# EAGLE board WattMeter_v2 (EAGLE 6.5.0)
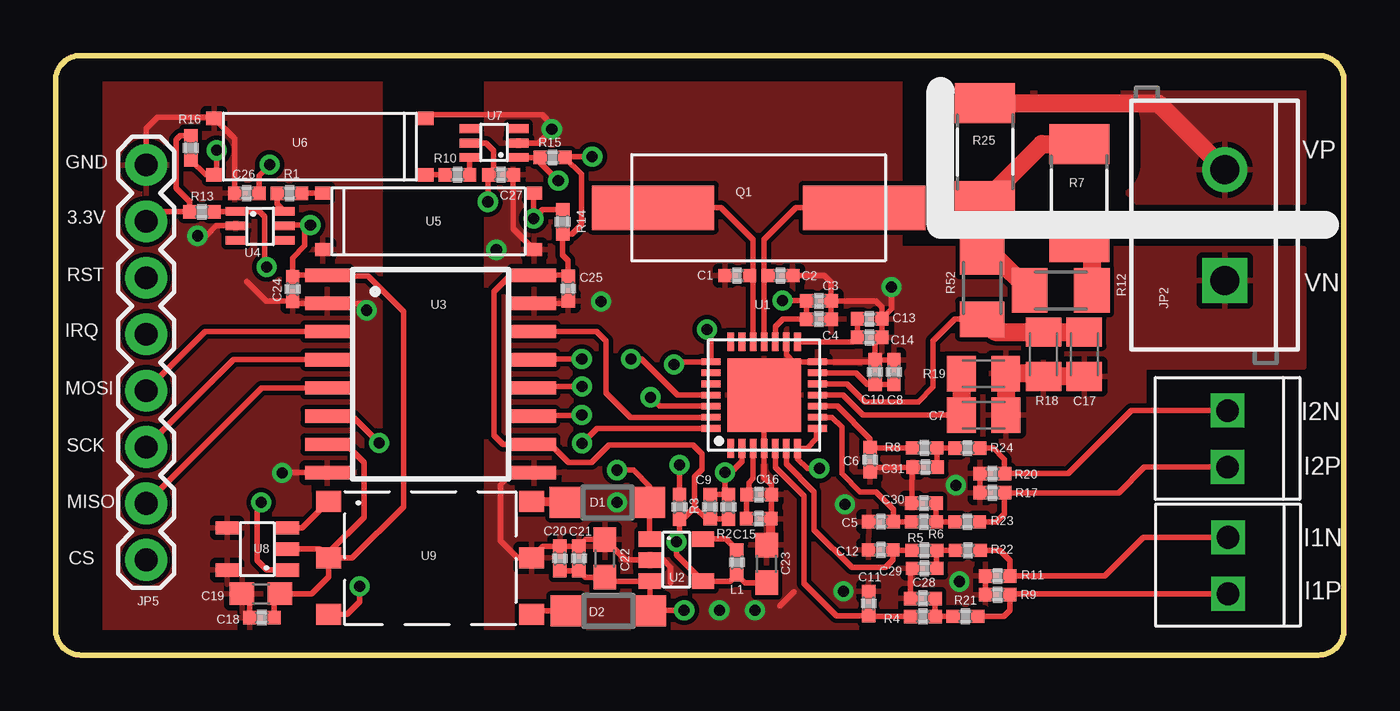
[diagram p0: board, top side]
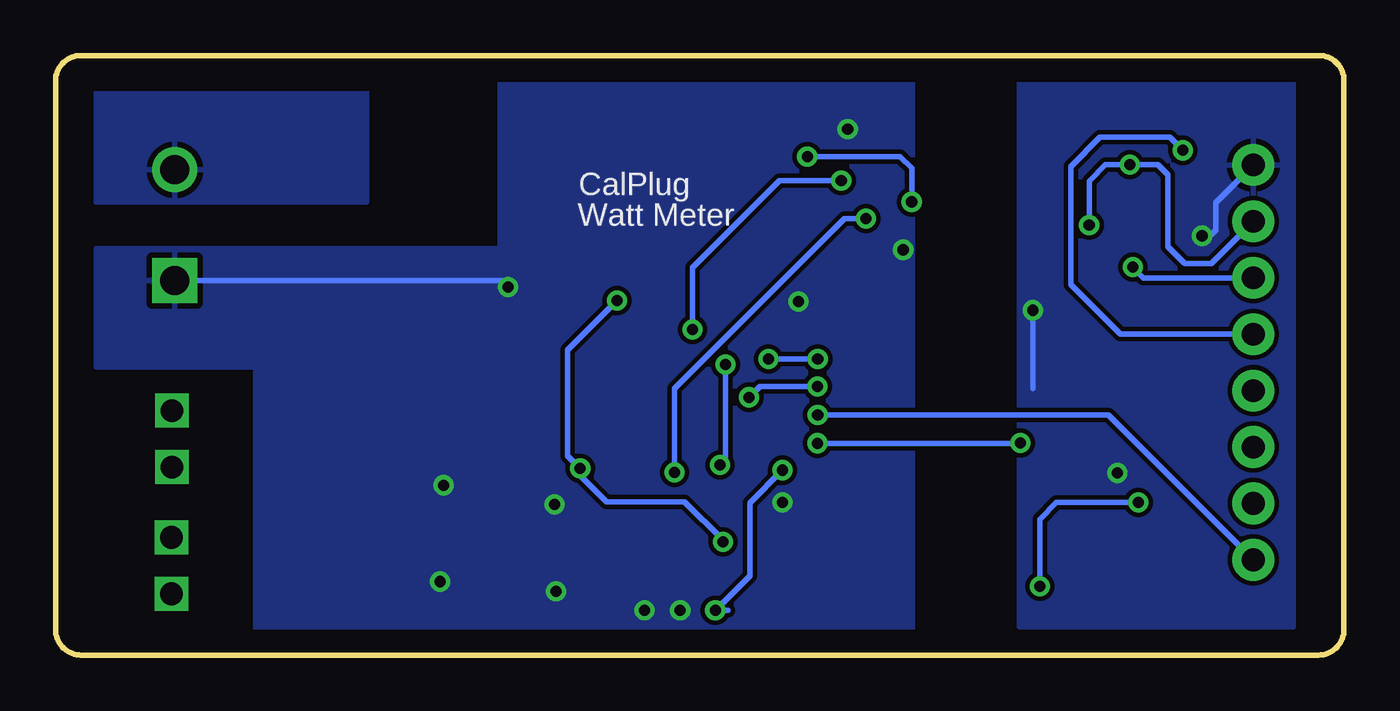
[diagram p1: board, bottom side, seen from below]

Size 58 x 27 mm. Coordinates in mm from the lower left corner, seen from the top.
Outline: 1.15,0 56.84,0 arc90 58,1.16 58,25.86 arc90 56.86,27 1.12,27 arc90 0,25.88 0,1.15 arc90 1.15,0
Copper layers (1*16): Top 0.035mm / dielectric 1.5mm / Bottom 0.035mm
Design rules "default": minimum track width 10mil, minimum drill 24mil, track to track 8mil, track to pad 8mil, pad to pad 8mil, via to via 8mil, smd to smd 8mil, copper to edge 40mil, drill to drill 8mil, minimum pad ring 10mil, minimum via ring 8mil, stop-mask expansion 4mil, vias tented up to drill 0mil, thermal gap 10mil
Net classes: 1 HIGHVOLTAGE: width 0.254 mm, drill 0.508 mm, clearance 2.413 mm to class 0, clearance 0.152 mm; 2 ic: width 0.152 mm, drill 0.305 mm, clearance 0.152 mm to class 0, clearance 2.413 mm to class 1, clearance 0.152 mm

## Footprints (pad centres in the part's own frame; a part is rotated, then mirrored left to right if it is on the bottom)
0402-CAP = smd 0.6 x 0.6: 1 -0.55,0; 2 0.55,0
C0805K = smd 1.3 x 1.6: 1 -1,0; 2 1,0
C0603 = smd 1.1 x 1: 1 -0.85,0; 2 0.85,0
SOD123 = smd 1.4 x 1.4: A 1.9,0; C -1.9,0
SCREWTERMINAL-5MM-2 = drill 1.3 pad 2.032 square: 1 0,0 | drill 1.3 pad 2.032: 2 5,0
1X02_2.54_SCREWTERM = drill 1.016 square: P1 2.54,0; P2 0,0
1X08_ROUND = drill 1.016 pad 1.88: 1 0,0; 2 2.54,0; 3 5.08,0; 4 7.62,0; 5 10.16,0; 6 12.7,0; 7 15.24,0; 8 17.78,0
0402-RES = smd 0.6 x 0.6: 1 -0.55,0; 2 0.55,0
HC-49S = smd 5.5 x 2: 1 -4.75,0; 2 4.75,0
R2010 = smd 1.8 x 2.7: 1 -2.2,0; 2 2.2,0
M1206 = smd 1.6 x 2: 1 -1.4,0; 2 1.4,0
C0805K@1 = smd 1.3 x 1.6: 1 -1,0; 2 1,0
28-WFQFN = smd 0.85 x 0.3: 1 -2.4,1.5; 2 -2.4,1; 3 -2.4,0.5; 4 -2.4,0; 5 -2.4,-0.5; 6 -2.4,-1; 7 -2.4,-1.5; 15 2.4,-1.5; 16 2.4,-1; 17 2.4,-0.5; 18 2.4,0; 19 2.4,0.5; 20 2.4,1; 21 2.4,1.5 | smd 0.3 x 0.85: 8 -1.5,-2.4; 9 -1,-2.4; 10 -0.5,-2.4; 11 0,-2.4; 12 0.5,-2.4; 13 1,-2.4; 14 1.5,-2.4; 22 1.5,2.4; 23 1,2.4; 24 0.5,2.4; 25 0,2.4; 26 -0.5,2.4; 27 -1,2.4; 28 -1.5,2.4 | smd 3.3 x 3.3: PAD 0,0
TSOT25 = smd 0.7 x 1: 1 0,0; 2 0.95,0; 3 1.9,0; 4 1.9,2.4; 5 0,2.4
16-SOIC = smd 2 x 0.6: 1 0,8.89; 2 0,7.62; 3 0,6.35; 4 0,5.08; 5 0,3.81; 6 0,2.54; 7 0,1.27; 8 0,0; 9 9.3,0; 10 9.3,1.27; 11 9.3,2.54; 12 9.3,3.81; 13 9.3,5.08; 14 9.3,6.35; 15 9.3,7.62; 16 9.3,8.89
DCKT = smd 0.9 x 0.4: 1 0,1.3; 2 0,0.65; 3 0,0; 4 2.2,0; 5 2.2,0.65; 6 2.2,1.3
4-SMD = smd 0.7 x 0.6: 1 0,2.54; 2 0,0; 3 9.52,0; 4 9.52,2.54
SOT-23-5 = smd 0.6 x 1.05: 1 0,0; 2 0.95,0; 3 1.9,0; 4 1.9,2.7; 5 0,2.7
TRANSFO_3.3 = smd 1.12 x 0.96: 1 0,5.08; 2 0,2.54; 3 0,0; 4 9.14,0; 5 9.14,2.54; 6 9.14,5.08

## Placement (x,y rotation side)
C1  20p  [0402-CAP]  30.69,17.09 0 top
C2  20p  [0402-CAP]  32.63,17.09 180 top
C3  4.7u  [0402-CAP]  34.36,15.95 180 top
C4  0.1u  [0402-CAP]  34.36,15.13 180 top
C5  33n  [0402-CAP]  37.16,6.01 0 top
C6  33n  [0402-CAP]  36.67,8.8 270 top
C7  68nF  [C0805K]  41.78,10.81 0 top
C8  0.1u  [0402-CAP]  37.74,12.74 90 top
C9  1u  [0402-CAP]  29.47,6.68 270 top
C10  4.7u  [0402-CAP]  36.89,12.74 90 top
C11  33n  [0402-CAP]  36.6,2.32 270 top
C12  33n  [0402-CAP]  37.15,4.74 180 top
C13  4.7u  [0402-CAP]  36.65,15.14 180 top
C14  0.1u  [0402-CAP]  36.65,14.31 180 top
C15  4.7u  [0402-CAP]  31.66,6.14 180 top
C16  0.1u  [0402-CAP]  31.68,7.23 180 top
C17  68nF  [C0805K]  46.31,13.55 270 top
C18  0.1u  [0402-CAP]  9.29,1.69 0 top
C19  10uF TANT  [C0603]  9.25,2.77 180 top
C20  0.1u  [0402-CAP]  22.7,4.35 270 top
C21  1u  [0402-CAP]  23.56,4.35 270 top
C22  10uF  [C0603]  24.73,4.36 90 top
C23  10uF  [C0603]  32.01,4.11 90 top
C24  0.1u  [0402-CAP]  10.67,16.49 270 top
C25  0.1u  [0402-CAP]  23.08,16.5 90 top
C26  0.1u  [0402-CAP]  8.61,20.8 180 top
C27  0.1u  [0402-CAP]  20.05,21.63 0 top
C28  33n  [0402-CAP]  39.04,2.55 0 top
C29  33n  [0402-CAP]  39.12,3.91 180 top
C30  33n  [0402-CAP]  39.09,6.84 0 top
C31  33n  [0402-CAP]  39.15,8.46 180 top
D1  MBR0520LT  [SOD123]  24.84,6.88 180 top
D2  MBR0520LT  [SOD123]  24.89,1.99 180 top
JP2  [SCREWTERMINAL-5MM-2]  52.63,16.86 90 top
JP3  [1X02_2.54_SCREWTERM]  52.78,5.3 270 top
JP4  [1X02_2.54_SCREWTERM]  52.76,11.01 270 top
JP5  [1X08_ROUND]  4.08,4.29 90 top
L1  15nH  [0402-RES]  30.67,4.18 270 top
Q1  QUARTZ_3.58M_2PIN  [HC-49S]  31.65,20.14 0 top
R1  560  [0402-RES]  10.53,20.8 180 top
R2  10k  [0402-RES]  30.29,6.68 90 top
R3  10k  [0402-RES]  28.09,6.68 90 top
R4  1k  [0402-RES]  39.04,1.74 180 top
R5  1k  [0402-RES]  39.11,4.72 180 top
R6  1k  [0402-RES]  39.09,6 180 top
R7  220k  [R2010]  46.08,20.81 90 top
R8  1k  [0402-RES]  39.12,9.33 180 top
R9  51  [0402-RES]  42.41,2.72 0 top
R10  560  [0402-RES]  18.09,21.63 0 top
R11  51  [0402-RES]  42.41,3.56 180 top
R12  120k  [M1206]  45.25,16.42 0 top
R13  10k  [0402-RES]  6.59,19.96 180 top
R14  10k  [0402-RES]  22.83,19.51 270 top
R15  10k  [0402-RES]  22.37,22.41 0 top
R16  10k  [0402-RES]  6.09,22.84 90 top
R17  51  [0402-RES]  42.17,7.31 0 top
R18  499R  [C0805K@1]  44.47,13.55 270 top
R19  499R  [C0805K@1]  41.77,12.67 0 top
R20  51  [0402-RES]  42.17,8.17 180 top
R21  100  [0402-RES]  40.96,1.75 180 top
R22  100  [0402-RES]  41.07,4.72 180 top
R23  100  [0402-RES]  41.04,6 180 top
R24  100  [0402-RES]  41.05,9.32 180 top
R25  220k  [R2010]  41.84,22.65 90 top
R52  120k  [M1206]  41.71,16.53 90 top
U1  ADE7953  [28-WFQFN]  31.9,11.71 90 top
U2  PAM2305  [TSOT25]  26.75,5.23 270 top
U3  ISO7241  [16-SOIC]  12.23,8.22 0 top
U4  SN74LVC  [DCKT]  8.11,18.68 0 top
U5  PS2505  [4-SMD]  12.03,18.26 0 top
U6  PS2505  [4-SMD]  16.66,24.17 180 top
U7  SN74LVC  [DCKT]  20.84,23.71 180 top
U8  SN6501  [SOT-23-5]  10.43,3.83 90 top
U9  TRANSFO_3.3  [TRANSFO_3.3]  12.29,1.84 0 top

## Library data of the parts
C1-C6 C8-C16 C18 C20 C21 C24-C31 L1 R1-R6 R8-R11 R13-R17 R20-R24 = Nizanlib
C7 C17 C19 C22 C23 R7 R12 R18 R19 R25 R52 = resistor
D1 D2 = diode
JP2 = SparkFun-Connectors; STOREFRONT_ID: PRT-08432
JP3-JP5 = SparkFun-Connectors
Q1 = CalPlug; DIGIKEY: http://www.digikey.com/product-detail/en/txc-corporation/9C-3.579545MBBK-T/887-2450-1-ND/4475440
U1 U8 = CalPlug
U2 = Damien_regulator
U3-U7 = Damien_divers
U9 = Damien_power

## Nets
CS: JP5.1 U3.11
CS_ISO: U1.28 U3.6
GND: C18.1 C19.2 C24.2 C26.2 JP5.8 U3.2 U3.8 U4.2 U5.2 U6.3 U8.4 U8.5
GNDI: C1.1 C2.1 C3.1 C4.1 C5.1 C6.2 C7.2 C8.2 C10.2 C11.1 C12.2 C13.1 C14.1 C15.1 C16.1 C17.2 C20.1 C21.1 C22.2 C23.2 C25.1 C27.2 C28.1 C29.2 C30.1 C31.2 JP2.1 R9.1 R11.2 R17.1 R18.2 R19.2 R20.2 U1.4 U1.14 U1.16 U1.PAD U2.2 U3.9 U3.15 U5.3 U6.2 U7.2 U9.5
I1N: JP3.P2 R11.1 R22.1
I1P: JP3.P1 R9.2 R21.1
I2N: JP4.P2 R20.1 R24.1
I2P: JP4.P1 R17.2 R23.1
IRQ: JP5.5 R16.1 U6.4
IRQ_ISO: R3.2 R15.1 U1.22 U7.1
MISO: JP5.2 U3.5
MISO_ISO: U1.26 U3.12
MOSI: JP5.4 U3.3
MOSI_ISO: U1.27 U3.14
N$1: C1.2 Q1.1 U1.19
N$2: C2.2 Q1.2 U1.18
N$3 [ic]: C7.1 R19.1 U1.11
N$4: L1.1 U2.5
N$7: C8.1 C10.1 U1.13
N$8: C13.2 C14.2 U1.15
N$10: C12.1 R5.2 U1.6
N$11: C11.2 R4.2 U1.5
N$12: C15.2 C16.2 U1.3
N$14: R12.1 R52.2
N$15: R7.1 R12.2
N$17: R7.2 R25.1
N$18: D1.A U9.6
N$19: C20.2 C21.2 C22.1 D1.C D2.C U2.1 U2.3
N$20: D2.A U9.4
N$21: U8.3 U9.1
N$23: U8.1 U9.3
N$24: C28.2 R4.1 R21.2
N$25: R1.1 U5.1
N$26: R1.2 U4.6
N$27: C29.1 R5.1 R22.2
N$28: C6.1 R8.2 U1.10
N$29: R10.1 U6.1
N$30: R10.2 U7.6
N$32: C5.2 R6.2 U1.9
N$33: C30.2 R6.1 R23.2
N$34: C31.1 R8.1 R24.2
RESET: JP5.6 R13.1 U4.1
RESET_ISO: C9.1 R2.2 R14.1 U1.2 U5.4
SCK: JP5.3 U3.4
SCK_ISO: U1.25 U3.13
V2P [ic]: C17.1 R18.1 R52.1 U1.12
VCC: C3.2 C4.2 C9.2 C23.1 C25.2 C27.1 L1.2 R2.1 R3.1 R14.2 R15.2 U1.7 U1.8 U1.17 U2.4 U3.10 U3.16 U7.5
VDD: C18.2 C19.1 C24.1 C26.1 JP5.7 R13.2 R16.2 U3.1 U3.7 U4.5 U8.2 U9.2
VP_IN: JP2.2 R25.2

## Tracks (layer width: path | path; a pad name or v marks a point on that pad's centre or on a via)
CS  (via drill 0.5)
  Top 0.254: U3.11 21.57,10.8 23.67,10.8 v23.69,10.82
  Top 0.406: U3.11 21.51,10.78
  Bottom 0.254: JP5.1 10.61,10.82 v23.69,10.82
CS_ISO  (via drill 0.5)
  Top 0.254: U3.6 13.36,10.76 v14.56,9.56 | v23.7,9.54 24.37,10.21 U1.28
  Bottom 0.254: v23.7,9.54 14.58,9.54 v14.56,9.56
GND  (via drill 0.5)
  Top 0.254: JP5.8 4.08,23.7 4.6,24.22 7.09,24.22 U6.3 8.06,23.25 C26.2 | v6.39,18.88 6.79,18.88 7.24,19.33 U4.2 8.39,19.33 | 8.6,16.82 9.48,15.94 C24.2 10.77,15.84 U3.2 13.98,15.84 v14,15.53 | 8.4,2.72 C19.2 8.74,2.43 C18.1 | U8.4 | U3.8 v10.21,8.22 v10.2,8.21
  Bottom 0.254: v6.39,18.88 6.03,18.88 5.78,19.13 5.78,20.37 JP5.8 | 14,12.01 v14,15.53
  pour Top: 2.24,26 14.61,26 14.61,1 2.24,1
  pour Bottom: 2.27,1.27 14.61,1.27 14.61,26 2.27,26
GNDI  (via drill 0.5)
  Top 0.254: C15.1 32.23,6.16 C16.1 32.23,7.65 31.9,7.98 U1.4 31.9,11.22 | C2.1 34.61,17.09 34.91,16.79 C3.1 | C27.2 20.6,19.21 U5.3 | U3.15 22.97,15.84 C25.1 | U7.2 21.75,23.06 22.13,23.44 22.13,24.1 21.9,24.33 16.82,24.33 U6.2 | 32.61,2.22 33.25,2.86 | 32.36,4.96 C23.2 | 27.69,3.26 27.69,3.96 27.37,4.28 U2.2 25.66,4.28 C22.2 23.87,5.21 C21.1 C20.1 21.95,4.9 U9.5 20.79,4.38 20.03,5.14 20.03,7.67 20.58,8.22 U3.9 | U1.16 32.9,13.53 33.22,13.21 33.4,13.21 U1.14 36.81,13.21 C10.2 | C3.1 C4.1 | C10.2 36.89,14 C14.1 C13.1 | C10.2 C8.2 | C13.1 37.2,15.68 36.93,15.95 C3.1 | C13.1 37.63,15.57 v37.63,16.58 | C30.1 38.54,8.4 C31.2 36.88,8.46 C6.2 | R17.1 R20.2 | R9.1 R11.2 | C28.1 38.49,3.83 C29.2
  Top 0.305: 33.4,13.21 33.4,12.72 33.25,12.56 | 33.25,12.56 31.9,11.22 | 32.9,12.91 33.25,12.56
  Top 0.406: C23.2 32.21,5.16 C15.1
  Top 0.813: C17.2 R18.2 | 44.35,12.67 R19.2 C7.2
  Bottom 0.254: JP2.1 37.91,16.86 v37.63,16.58
  other vias: 29.88,2.01 31.48,2.01 22.34,23.69 40.53,7.65 40.69,3.31 35.53,6.79 19.84,18.25 24.55,15.92 25.27,6.88 35.47,2.87
  pour Top: 19.41,26 19.41,1 49,1 49,12.98 56.18,12.98 56.18,18.3 38,18.3 38,26
  pour Bottom: 19.42,1 19.42,26 38,26 38,18.3 56.18,18.3 56.18,12.98 49,12.98 49,1
I1N
  Top 0.254: R22.1 42.51,4.72 42.96,4.27 R11.1 47.23,3.56 48.97,5.3 JP3.P2
I1P
  Top 0.254: R21.1 42.69,1.75 42.96,2.02 R9.2 43,2.76 JP3.P1
I2N
  Top 0.254: R24.1 42.22,9.32 42.72,8.82 R20.1 45.59,8.17 48.43,11.01 JP4.P2
I2P
  Top 0.254: R23.1 42.36,6 42.72,6.36 R17.2 47.86,7.31 49.02,8.47 JP4.P1
IRQ  (via drill 0.5)
  Top 0.254: R16.1 6.75,21.63 U6.4 7.26,21.75 v7.26,22.73
  Bottom 0.254: v7.26,22.73 7.85,23.32 10.98,23.32 12.3,22 12.3,16.69 10.06,14.45 JP5.5
IRQ_ISO  (via drill 0.5)
  Top 0.254: U7.1 R15.1 21.82,22.18 v22.63,21.37 | v29.33,14.66 29.5,14.49 U1.22 27.96,13.21 v27.84,13.09 | v28.09,8.56 R3.2
  Bottom 0.254: v29.33,14.67 v29.33,14.66 29.33,17.45 25.41,21.37 v22.63,21.37 | v28.09,8.56 27.84,8.81 v27.84,13.09
MISO
  Top 0.254: JP5.2 9.28,12.03 U3.5
MISO_ISO  (via drill 0.5)
  Top 0.254: U1.26 27.19,11.21 v26.79,11.61 | U3.12 21.6,12.1 v23.7,12.1
  Bottom 0.254: v26.79,11.61 26.3,12.1 v23.7,12.1
MOSI
  Top 0.254: JP5.4 6.74,14.57 U3.3
MOSI_ISO
  Top 0.254: U1.27 25.89,10.71 24.79,11.81 24.79,14.14 24.36,14.57 U3.14
N$1
  Top 0.254: 26.86,19.43 Q1.1 29.97,20.14 31.4,18.71 31.4,17.25 C1.2 31.24,17 31.4,16.83 U1.19
N$2
  Top 0.254: 36.4,19.75 Q1.2 33.34,20.14 31.9,18.71 31.9,17.27 C2.2 31.9,16.91 U1.18
N$3
  Top 0.254: U1.11 35.44,11.71 36.34,10.81 C7.1
  Top 0.813: R19.1 C7.1
N$4
  Top 0.254: U2.5 30.17,5.23 L1.1
N$7
  Top 0.254: U1.13 36.04,12.71 36.56,12.19 C10.1 C8.1
N$8
  Top 0.254: C13.2 C14.2 35.9,14.11 U1.15
N$10
  Top 0.254: R5.2 37.72,4.72 C12.1 37.7,4.3 37.35,3.95 35.85,3.95 34.15,5.65 34.15,7.35 32.9,8.6 U1.6
N$11
  Top 0.254: R4.2 36.64,1.74 C11.2 35.15,1.77 33.69,3.23 33.69,7.16 32.4,8.45 U1.5
N$12
  Top 0.254: U1.3 31.4,7.95 31.21,7.76 31.21,7.31 C16.2 31.11,7.21 C15.2
N$14
  Top 0.813: R12.1 42.34,17.93 R52.2
N$15
  Top 0.813: R7.1 46.65,18.04 R12.2
N$17
  Top 0.813: R25.1 44.4,23.01 R7.2
N$18
  Top 0.406: U9.6 22.94,6.92 D1.A
N$19  (via drill 0.5)
  Top 0.254: C22.1 23.85,3.51 C21.2 C20.2 | 24.91,3.33 U2.3 26.75,2.03 D2.C | D2.C 26.76,1.77 arc-90 26.75,1.78 | U2.1 arc-90 U2.1 D1.C 26.74,7.6 26.01,8.33 v25.27,8.33 | D2.C 26.81,2.01 v28.3,2.01
  Top 0.406: C22.1 24.91,3.33
  Bottom 0.254: 27.72,2.01 v28.3,2.01 26.74,3.57 26.74,6.86 v25.27,8.33
N$20
  Top 0.254: U9.4 21.53,1.74 21.78,1.99 D2.A
N$21
  Top 0.254: U9.1 11.1,5.73 U8.3
N$23  (via drill 0.5)
  Top 0.254: U8.1 9.51,3.83 9.07,4.27 9.07,6.68 v9.26,6.87 | v13.69,3.09 13.69,2.4 13.13,1.84 U9.3
  Bottom 0.254: v9.26,6.87 12.94,6.87 13.69,6.12 v13.69,3.09
N$24
  Top 0.254: R21.2 R4.1 C28.2
N$25
  Top 0.254: R1.1 U5.1
N$26
  Top 0.254: R1.2 9.98,20.31 U4.6
N$27
  Top 0.254: C29.1 R5.1 R22.2
N$28
  Top 0.254: C6.1 36.69,9.33 R8.2 | U1.10 35.19,11.21 36.67,9.73 C6.1 | 36.67,9.51 C6.1
N$29
  Top 0.254: U6.1 R10.1
N$30
  Top 0.254: R10.2 U7.6
N$32
  Top 0.254: R6.2 C5.2 37.71,6.56 36.92,7.35 36.21,7.35 35.39,8.17 35.39,10.27 34.95,10.71 U1.9
N$33
  Top 0.254: C30.2 R6.1 R23.2
N$34
  Top 0.254: C31.1 39.67,8.49 R8.1 R24.2
RESET  (via drill 0.5)
  Top 0.254: R13.1 8.11,19.96 U4.1 9.19,19.98 9.42,19.75 9.42,17.56 v9.51,17.47
  Bottom 0.254: JP5.6 9.03,16.99 v9.51,17.47
RESET_ISO  (via drill 0.5)
  Top 0.254: U1.2 30.9,8.72 30.4,8.22 v30.13,8.22 | R2.2 30.13,7.24 | v30.13,8.22 v30.12,8.21 | 30.11,7.22 R2.2 | U5.4 21.52,20.77 v21.52,19.66 21.92,20.06 R14.1 | R2.2 30.13,7.39 v30.13,8.22 | C9.1 R2.2
  Bottom 0.254: v30.13,8.22 30.13,12.01 22.48,19.66 v21.52,19.66
SCK
  Top 0.254: JP5.3 8.01,13.3 U3.4
SCK_ISO  (via drill 0.5)
  Top 0.254: U3.13 21.56,13.33 v23.69,13.33 | v25.91,13.33 26.38,13.33 28,11.71 U1.25
  Bottom 0.254: v25.91,13.33 v23.69,13.33
V2P
  Top 0.254: U1.12 35.63,12.21 36.43,11.41 38.84,11.41 39.5,12.07 39.5,14.15 40.48,15.13 R52.1
  Top 0.813: R52.1 42.29,14.55 R18.1 C17.1
VCC  (via drill 0.5)
  Top 0.254: U1.8 34.26,10.17 34.26,9.75 33.82,9.31 U1.7 | 29.28,6.13 C9.2 | 30.11,6.12 R2.1 C9.2 | U7.5 19.38,23.06 19.72,22.72 19.72,21.85 C27.1 19.46,21.59 v19.46,20.41 | v24.16,22.45 22.96,22.45 R15.2 23.67,21.66 23.67,19.39 23.24,18.96 R14.2 22.83,18.02 23.08,17.77 C25.2 23.02,17.11 U3.16 20.48,17.11 19.74,16.37 19.74,9.89 20.14,9.49 U3.10 22.29,9.49 23.1,8.68 24.13,8.68 24.91,9.46 28.7,9.46 29.1,9.06 29.1,8.35 28.77,8.02 28.77,6.66 | C23.1 31.04,3.26 L1.2 30.37,3.33 U2.4 27.96,4.52 v27.96,5.1 28.09,5.23 R3.1 | R3.1 27.96,6 | 28.77,6.66 29.3,6.13 C9.2 | 28.77,6.66 28.24,6.13 R3.1 | U1.17 32.4,14.79 32.74,15.13 C4.2 C3.2 v32.73,15.96 | 33.4,9.04 U1.7 | U1.7 33.4,8.84 33.84,8.4 v34.38,8.4
  Bottom 0.254: v24.16,22.45 19.98,22.45 19.46,21.93 v19.46,20.41 | v32.73,15.96 34.94,13.75 34.94,8.96 v34.38,8.4 34.38,8.1 33.19,6.91 29.69,6.91 27.96,5.18 v27.96,5.1
VDD  (via drill 0.5)
  Top 0.254: JP5.7 4.53,19.98 6.02,19.98 R13.2 6.04,20.42 5.44,21.02 5.44,23.22 5.61,23.39 R16.2 | C26.1 9.16,21.6 v9.64,22.08 | U3.1 | U3.1 10.69,17.11 C24.1 10.67,17.89 11.22,18.44 11.22,19.12 v11.47,19.37 10.35,19.37 U4.5 | U9.2 13.36,4.38 15.66,6.68 15.66,15.46 14.06,17.06 12.28,17.06 U3.1 | U3.7 13.07,9.49 13.88,8.68 13.88,6.21 12.29,4.62 U9.2 | U8.2 11.89,4.78 U9.2 | C18.2 9.84,2.51 C19.1 11.54,2.77 12.29,3.52 U9.2
  Bottom 0.254: JP5.7 5.98,17.63 7.17,17.63 7.93,18.39 7.93,21.64 8.37,22.08 v9.64,22.08 10.74,22.08 11.47,21.35 v11.47,19.37
VP_IN
  Top 0.813: JP2.2 49.64,24.85 R25.2
  pour Top (isolate 1.422): 44,25.94 44,20.4 56.18,20.4 56.18,25.94
  pour Bottom (isolate 1.422): 44,20.4 44,25.93 56.17,25.93 56.17,20.4

## Text on the board
tNames: VP | GND | 3.3V | RST | VN | IRQ | MOSI | I2N | SCK | I2P | MISO | I1N | CS | I1P
bNames: CalPlug | Watt Meter